# Altium PCB Solens.PcbDoc (part 2 of 3)
Units mil, origin at the board's own origin, x right, y up, seen from the top; angles counter-clockwise.
Board outline 5511.81 x 2755.91 mil, 4 copper layers (Top Layer, Signal Layer 2, Signal Layer 1, Bottom Layer), stack 65.08 mil thick; 208 components, 216 nets, 806 pads, 433 vias.
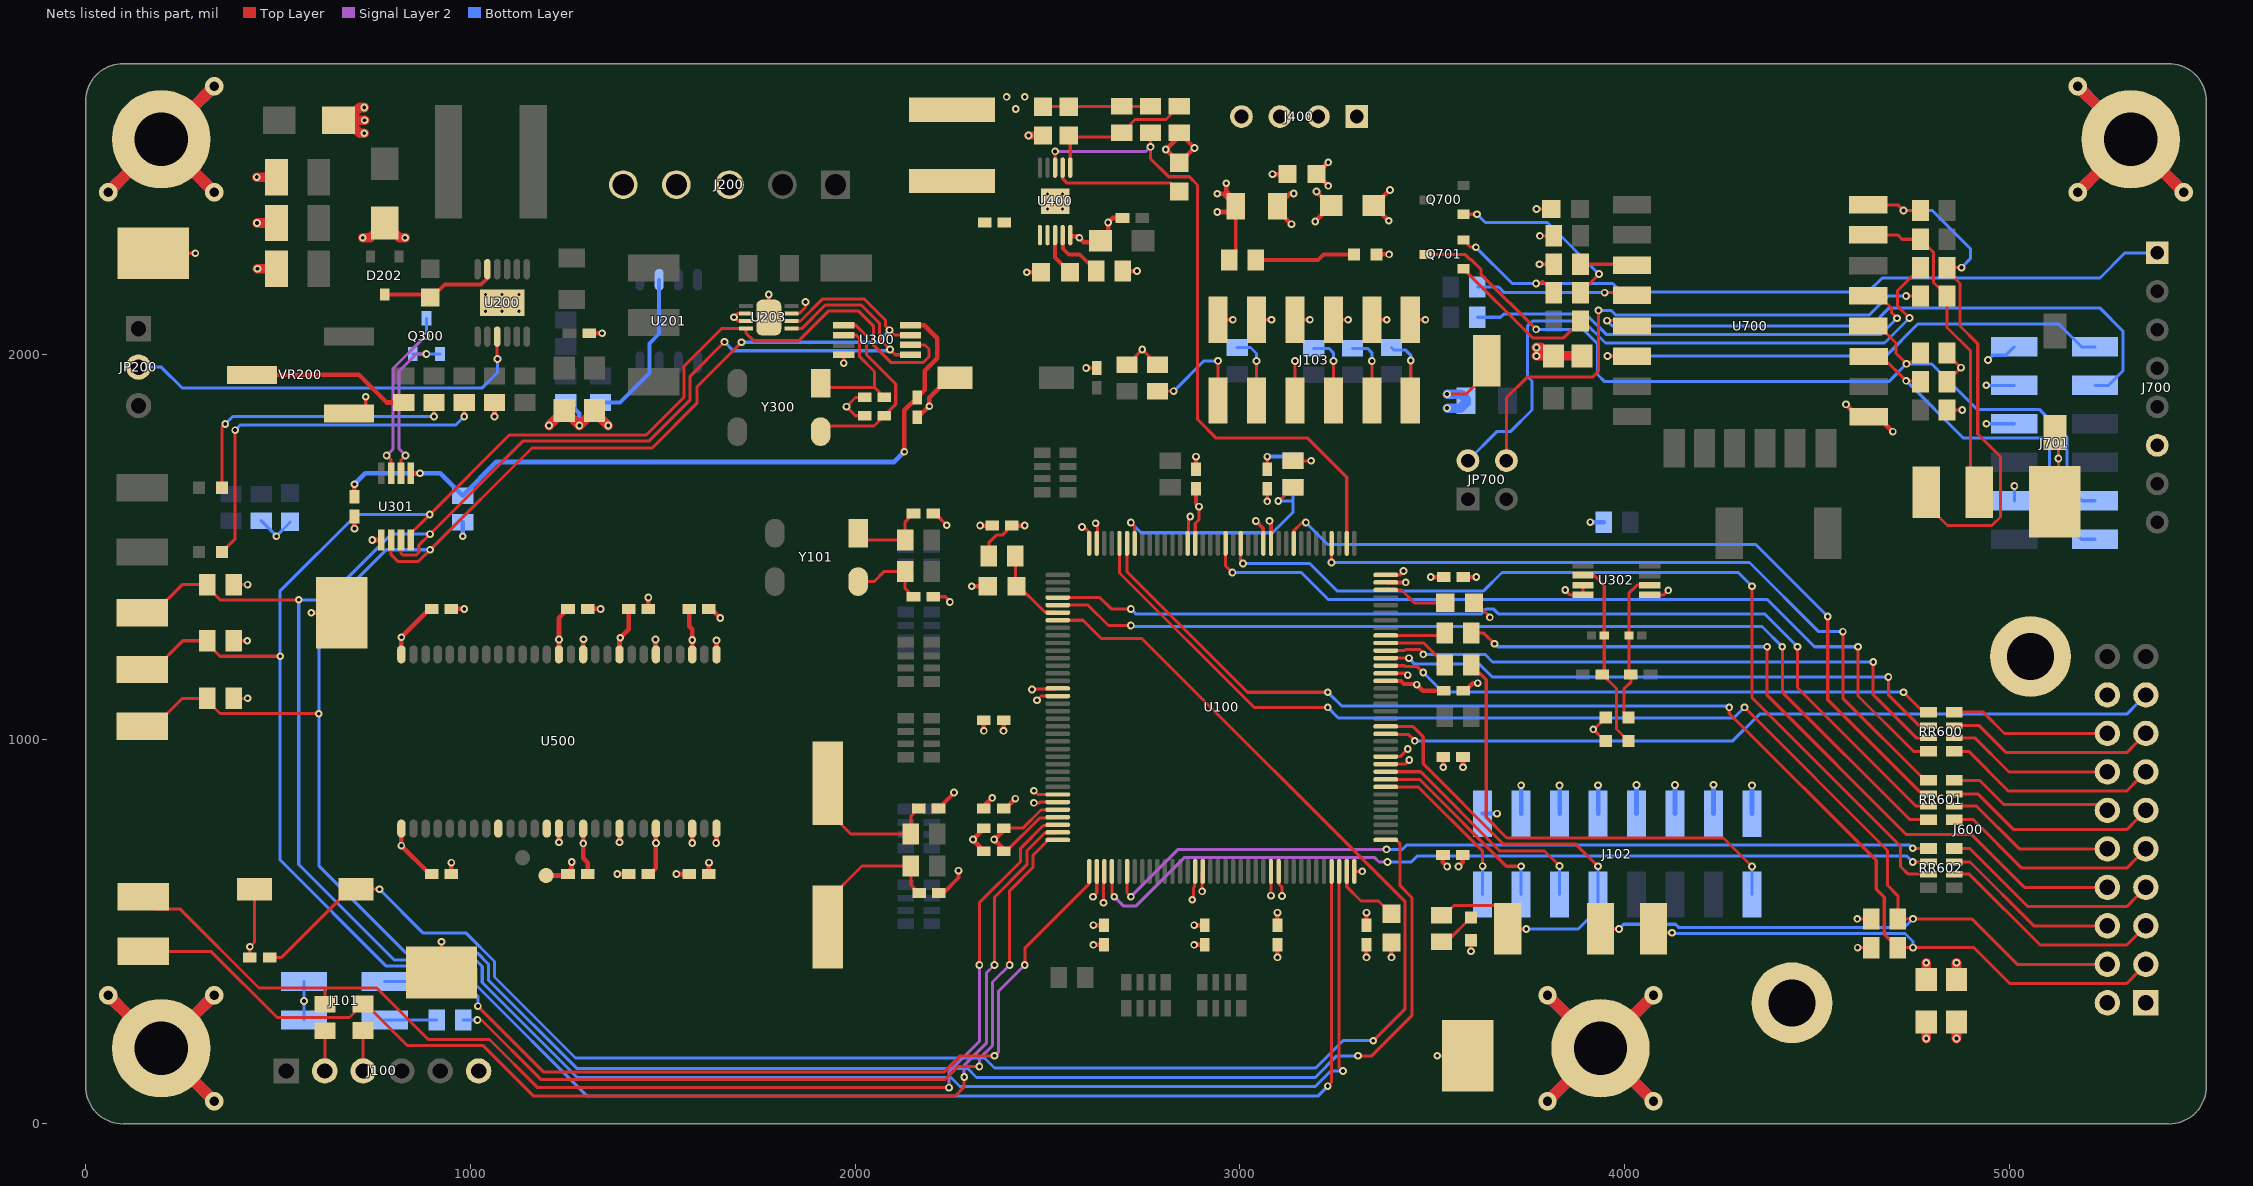
[diagram p4: the nets of this part, all layers, seen from the top]

## Via types
v1: diameter 20, hole 10, Top Layer to Bottom Layer, 392 vias
v2: diameter 20, hole 10, Top Layer to Bottom Layer, tented both sides, 14 vias
v3: diameter 47.24, hole 23.62, Top Layer to Bottom Layer, 13 vias
v4: diameter 24, hole 8, Top Layer to Bottom Layer, 10 vias
v5: diameter 20, hole 10, Top Layer to Bottom Layer, tented top, 4 vias

## Nets (pads, with @x,y where several pads share a name; then routed paths per layer and width w, separated by ;. In a path a pad name is that pad's centre, name@x,y a point inside that pad or via, vN(x,y) a via of type N, cw(c..) or ccw(c..) an arc to the next point about the centre after c; other vN are vias at no path point)
3V3: C104.1 C105.1 C107.1 C108.1 C109.1 C110.1 C111.1 C112.1 C116.1 C117.1 C118.1 C119.1 C120.1 C121.1 C122.1 C405.1 C406.2 C500.1 C501.1 C502.1 C503.1 C504.1 C505.1 C506.1 C507.1 C600.1 C601.1 J102.10 J102.14 J400.2 J400.3 J600.1 R106.1 R107.1 R108.1 R300.1 R301.1 R302.1 R400.1 R600.1 R601.1 R700.2 R701.2 R702.1 R703.1 SJ112.1 SJ300.1 SJ301.2 SJ700.1 TP104.1 U100.17 U100.30 U100.32 U100.33 U100.39 U100.52 U100.62 U100.72 U100.84 U100.95 U100.108 U100.121 U100.131 U100.143 U100.144 U500.1 U500.3 U500.9 U500.14 U500.27 U500.43 U500.49 | length 4115.7
  Top Layer w8: R302.1@384.84,1106.3 v1(421.26,1106.3) v1@422.24,1105.31 ; R301.1@384.84,1255.91 v1(420.28,1255.91) ; R300.1@384.84,1401.57 v1(421.26,1401.57) v1@422.24,1400.59 ; U500.14@1230.32,1220.47 1229.33,1221.46 U500.14@1230.32,1222.44 ; U500.43@1293.31,750.57 1294.29,751.55 1293.31,752.54 1290.64,755.2 1293.31,757.87 1292.32,758.86 1293.31,759.84 1290.35,762.8 1293.31,765.75 1294.29,766.73 U500.43@1293.31,767.72 ; U500.9@1387.8,1220.47 1386.81,1221.46 1387.8,1222.44 1388.78,1223.43 1387.8,1224.41 1385.83,1226.38 1386.81,1227.36 1384.84,1229.33 1387.8,1232.28 1388.78,1233.27 1387.8,1234.25 1386.81,1235.24 1387.8,1236.22 U500.9@1388.78,1237.2 ; U500.49@1482.28,765.75 1481.3,766.73 U500.49@1482.28,767.72 ; U500.3@1576.77,1220.47 1577.76,1221.46 1576.77,1222.44 1574.8,1224.41 1576.77,1226.38 1575.79,1227.36 U500.3@1576.77,1228.35 ; U500.1@1639.76,1220.47 1640.75,1221.46 U500.1@1639.76,1222.44 ; SJ112.1@2347.44,1476.38 2348.43,1476.38 2338.58,1486.22 2348.43,1496.06 2348.43,1511.81 2366.94,1530.32 2382.69,1530.32 C107.1@2407.48,1555.12 ; v1@2361.22,733.27 v1(2361.22,739.17) v1@2361.22,745.1 ; C105.1@2385.83,708.66 2392.72,708.66 2479.42,795.37 2509.93,795.37 2513.69,799.12 2524.7,799.12 U100.33@2526.57,797.24 ; C104.1@2385.83,768.7 2435.71,768.7 2482.96,815.94 2525.59,815.94 U100.32@2526.57,816.93 ; C109.1@2385.83,819.88 C109.1@2390.75,819.88 ; v1(2385.83,1021.65) v1@2386.81,1020.67 ; v1(2464.57,866.14) 2474.41,856.3 U100.30@2526.57,856.3 ; v1(2472.44,1101.38) 2483.27,1112.2 U100.17@2526.57,1112.2 ; v1(2589.57,1551.18) 2590.55,1551.18 2592.52,1553.15 2608.27,1537.4 U100.144@2608.27,1508.86 ; v1(2625,1561.02) 2629.83,1556.19 2629.83,1512.7 2626.97,1509.84 U100.143@2627.95,1508.86 ; v1(2645.67,574.8) 2645.76,574.89 2645.76,654.62 U100.39@2647.64,656.5 ; R107.1@2706.69,1973.43 v1(2746.06,2012.8) R106.1@2785.43,1973.43 ; U100.131@2864.17,1508.86 2866.05,1510.74 2866.05,1573.73 v1(2871.06,1578.74) ; v1(2901.82,604.58) 2901.82,654.77 U100.52@2903.54,656.5 ; U100.62@3100.39,656.5 3102.27,654.62 3102.27,622.45 3109.41,615.31 v1(3109.41,592.69) ; U100.72@3297.24,656.5 v1(3317.91,656.5) ; U100.84@3378.94,954.72 3416.34,954.72 v1(3436.02,974.41) ; v1@3425.2,1434.13 v1(3425.2,1437.01) ; v1(3538.39,1896.65) 3587.6,1896.65 3641.73,1950.79 TP104.1@3641.73,1983.27 ; v1@3777.56,2235.24 v1(3778.59,2234.2) R701.2@3815.94,2234.2 ; v1@3778.54,2307.09 v1(3779.5,2308.05) R700.2@3815.94,2308.05 ; v1(4604.33,533.07) R600.1@4640.75,533.07 ; v1(4605.31,458.27) R601.1@4640.75,458.27 ; R703.1@4837.6,1929.13 v1(4874.02,1965.55) 4837.6,2001.97 R702.1@4837.6,2003.83
  Top Layer w10: C121.1@2885.83,1701.77 v1(2885.83,1734.25) ; v1(3041.34,1566.93) 3060.15,1548.12 3060.15,1509.74 U100.121@3061.02,1508.86 ; C120.1@3070.87,1701.77 v1(3070.87,1734.25) ; U100.95@3378.94,1171.26 3431.35,1171.26 v1(3436.2,1166.41) ; U100.108@3378.94,1427.17 3415.35,1427.17 v1(3425.2,1437.01)
  Top Layer w12: U500.27@820.87,1220.47 v2(820.87,1264.76) 894.69,1338.58 C500.1@899.61,1338.58 ; v1@948.82,681.1 v1(950.79,679.13) C504.1@950.79,649.61 ; U500.14@1230.32,1220.47 1230.32,1222.44 v2(1230.32,1258.86) 1230.32,1314.96 C501.1@1253.94,1338.58 ; U500.43@1293.31,765.75 1293.31,759.84 1293.31,757.87 1293.31,752.54 1293.31,750.57 v2(1293.31,729.33) 1293.31,690.94 1305.12,679.13 C505.1@1305.12,649.61 ; U500.9@1387.8,1220.47 1387.8,1222.44 1387.8,1224.41 1387.8,1232.28 1387.8,1234.25 1387.8,1236.22 1387.8,1261.81 v2(1389.76,1263.78) 1411.42,1285.43 C502.1@1411.42,1338.58 ; C506.1@1462.6,649.61 1467.52,649.61 1482.28,664.37 v2(1482.28,730.32) 1482.28,765.75 U500.49@1482.28,767.72 ; C503.1@1568.9,1338.58 1568.9,1293.31 1576.77,1285.43 v2(1576.77,1257.87) 1576.77,1228.35 1576.77,1226.38 1576.77,1222.44 U500.3@1576.77,1220.47 ; C507.1@1620.08,649.61 v1(1620.08,679.13) v1@1622.05,681.1 ; U500.1@1639.76,1222.44 v2(1639.76,1256.89) ; C105.1@2385.83,708.66 2385.83,714.57 v1(2361.22,739.17) 2385.83,763.78 C104.1@2385.83,768.7 ; v1(2385.83,1021.65) C108.1@2385.83,1049.21 ; C109.1@2390.75,819.88 v1(2416.34,845.47) ; C107.1@2407.48,1555.12 v1(2440.94,1555.12) ; v1(2619.09,465.55) C110.1@2646.65,465.55 ; v1(2880.91,465.55) C111.1@2908.46,465.55 ; v1(3084.65,2468.5) C406.2@3124.02,2468.5 ; v1@3096.46,432.09 v1(3097.44,433.07) C112.1@3097.44,465.55 ; v1@3133.86,2337.6 v1(3133.86,2338.58) 3097.44,2375 R400.1@3097.44,2384.84 3130.91,2418.31 v1(3139.76,2418.31) ; v1(3195.87,2345.47) C405.1@3237.2,2386.81 3235.24,2386.81 v1(3198.82,2423.23) ; v1(3328.74,433.07) C116.1@3328.74,465.55 ; v1(3567.91,669.29) 3578.74,680.12 C122.1@3578.74,698.82 ; v1(3579.72,927.17) C117.1@3579.72,953.74 ; C118.1@3580.71,1125.98 3585.63,1125.98 3605.32,1145.67 v1(3618.11,1145.67) ; C119.1@3580.71,1421.26 v1(3614.17,1421.26)
  Top Layer w25: C601.1@4783.46,375.59 v1(4783.46,418.9) ; C600.1@4862.2,375.59 v1(4862.2,418.9)
  Signal Layer 2 w8: v1@2469.3,1103.54 2466.73,1103.54 2468.89,1101.38 v1(2472.44,1101.38)
  Bottom Layer w10: v1(3070.87,1734.25) 3117.13,1734.25 3127.95,1723.42 R108.1@3137.8,1723.42
  Bottom Layer w12: v1(980.32,1527.56) SJ300.1@980.32,1563.98 ; SJ700.1@3587.6,1879.92 SJ700.1@3587.6,1883.86 ; J102.14@3730.71,806.46 v1(3730.71,880.31) v1@3731.3,880.91 ; v1(3910.43,1563.98) SJ301.2@3945.87,1563.98 ; J102.10@3930.71,806.46 v1(3930.71,880.31)
  Bottom Layer w25: v1(3538.39,1860.24) 3572.83,1860.24 3587.6,1875 SJ700.1@3587.6,1879.92 ; v1(3538.39,1896.65) 3574.8,1896.65 SJ700.1@3587.6,1883.86
3V3_P: C302.1 C303.1 SJ300.2 U300.8 U301.1 | length 1984.3
  Top Layer w12: C303.1@698.82,1629.92 v1(698.82,1662.4) ; U301.1@845.47,1690.94 v1(869.09,1690.94) v1@870.08,1691.93 ; v1(2127.95,1747.05) 2127.95,1854.33 C302.1@2161.42,1887.8 2181.1,1907.48 2181.1,1957.68 2213.58,1990.16 2213.58,2042.32 2180.12,2075.79 U300.8@2143.7,2075.79
  Bottom Layer w12: v1(698.82,1662.4) 727.36,1690.94 v1(869.09,1690.94) 922.24,1690.94 SJ300.2@980.32,1632.87 1067.91,1720.47 2101.38,1720.47 v1(2127.95,1747.05)
3V3_PG: R402.1 U100.110 U400.8 | length 1744.1
  Top Layer w8: U400.8@2519.69,2485.24 v1(2519.69,2527.56) ; R402.1@2767.72,2575.79 v1(2767.72,2539.37) 2767.72,2508.62 2814.72,2461.61 2868.35,2461.61 2889.76,2440.2 2889.76,1831.1 2938.38,1782.48 3176.18,1782.48 3277.56,1681.1 U100.110@3277.56,1508.86
  Signal Layer 2 w8: v1(2519.69,2527.56) 2755.91,2527.56 v1(2767.72,2539.37)
BOOST: C200.2 D202.3 U200.11 | length 324.4
  Top Layer w10: D202.3@777.56,2155.51 887.8,2155.51 C200.2@895.67,2147.64 ; C200.2@887.02,2144.48 896.45,2144.48 933.47,2181.5 1027.96,2181.5 1044.29,2197.83 U200.11@1044.29,2221.46
BOOT0: R108.2 R109.1 U100.138 | length 669.3
  Top Layer w8: v1(2716.54,1562.99) 2726.38,1553.15 U100.138@2726.38,1508.86 ; v1(3099.41,1619.09) 3102.36,1619.09 R109.1@3137.8,1654.53
  Bottom Layer w8: v1(2716.54,1562.99) 2743.11,1536.42 3084.65,1536.42 3137.8,1589.57 3137.8,1618.11 ; v1(3099.41,1619.09) 3136.81,1619.09 3137.8,1618.11 ; R108.2@3137.8,1654.53 3137.8,1618.11
BTN0: C106.1 SW100.1 U100.7 | length 4788.1
  Top Layer w8: C106.1@478.35,433.07 509.84,433.07 687.01,610.24 SW100.1@702.76,610.24 v1(763.78,610.24) ; U100.7@2526.57,1309.06 2592.14,1309.06 2639.38,1261.81 2745.08,1261.81 3429.32,577.57 3429.32,299.4 v1(3346.46,216.54)
  Bottom Layer w8: v1(763.78,610.24) 877.95,496.06 989.38,496.06 1062.95,422.49 1062.95,381.93 1273.28,171.61 2336.27,171.61 2362.2,145.67 3196.85,145.67 3267.72,216.54 v1(3346.46,216.54)
CAM_D0: RR600.1 U100.96 | length 1460.5
  Top Layer w7.87: v1(4724.41,1122.05) 4776.18,1070.28 RR600.1@4789.37,1070.28
  Top Layer w8: U100.96@3378.94,1190.94 3427.8,1190.94 3430.33,1188.41 3461.2,1188.41 v1(3476.38,1173.17) v1(3476.38,1173.17)
  Bottom Layer w7.87: v1(3476.38,1173.17) v1(3476.38,1173.17) 3527.56,1122.05 v1(4724.41,1122.05)
CAM_D1: RR600.2 U100.97 | length 1514.2
  Top Layer w7.87: v1(4685.04,1161.42) 4685.04,1115.16 4765.16,1035.04 RR600.2@4789.37,1035.04
  Top Layer w8: U100.97@3379.01,1210.7 v1(3439.15,1210.7)
  Bottom Layer w7.87: 3632.02,1184.91 3655.51,1161.42 v1(4685.04,1161.42) v1@4688.98,1161.42
  Bottom Layer w8: v1(3439.15,1210.7) 3454.69,1195.17 3467.27,1195.17 3621.76,1195.17 3632.02,1184.91
CAM_D2: RR600.3 U100.98 | length 1558.8
  Top Layer w7.87: U100.98@3378.94,1230.31 3427.74,1230.31 3430.07,1232.64 3468.13,1232.64 3476.37,1224.4 v1(3476.37,1220.46) ; v1(4645.67,1200.79) 4645.67,1115.16 4757.28,1003.54 RR600.3@4789.37,1003.54
  Bottom Layer w7.87: v1(3476.37,1220.46) 3636.82,1220.46 3656.5,1200.79 v1(4645.67,1200.79)
CAM_D3: RR600.4 U100.126 | length 2159.7
  Top Layer w8: U100.126@2962.6,1508.86 2962.6,1450.77 v1(2980.31,1433.06) ; v1(4606.3,1240.16) 4606.3,1112.2 4750.2,968.31 RR600.4@4789.37,968.31
  Bottom Layer w8: v1(2980.31,1433.06) 3159.46,1433.06 3229.33,1363.19 4370.08,1363.19 4493.11,1240.16 v1(4606.3,1240.16)
CAM_D4: RR601.1 U100.112 | length 1936.7
  Top Layer w8: v1(3238.19,1459.35) U100.112@3238.19,1508.86 ; v1(4566.93,1279.53) 4566.93,1106.3 4780.12,893.11 RR601.1@4789.37,893.11
  Bottom Layer w8: v1(3238.19,1459.35) 4324.11,1459.35 4503.94,1279.53 v1(4566.93,1279.53)
CAM_D5: RR601.2 U100.117 | length 2110
  Top Layer w8: U100.117@3139.76,1508.86 3139.76,1541.36 3161.4,1562.99 v1(3171.26,1562.99) ; v1(4527.56,1318.9) 4527.56,1102.36 4772.05,857.87 RR601.2@4789.37,857.87
  Bottom Layer w8: v1(3171.26,1562.99) 3228.35,1505.91 4340.55,1505.91 v1(4527.56,1318.9)
CAM_D6: RR601.3 U100.4 | length 2560.1
  Top Layer w8: U100.4@2526.57,1368.11 2635.83,1368.11 2665.35,1338.58 v1(2716.54,1338.58) ; v1(4448.82,1240.16) 4448.82,1133.86 4756.3,826.38 RR601.3@4789.37,826.38
  Bottom Layer w8: v1(2716.54,1338.58) 2729.33,1325.79 3627.7,1325.79 3640.49,1338.58 3658.72,1338.58 3671.51,1325.79 4363.19,1325.79 v1(4448.82,1240.16)
CAM_D7: RR601.4 U100.5 | length 2562.8
  Top Layer w8: U100.5@2526.57,1348.43 2605.31,1348.43 2658.46,1295.28 v1(2716.54,1295.28) ; v1(4409.45,1240.16) 4409.45,1122.05 4740.35,791.14 RR601.4@4789.37,791.14
  Bottom Layer w8: v1(2716.54,1295.28) 2718.85,1292.96 4356.65,1292.96 v1(4409.45,1240.16)
CAM_HREF: RR602.2 U100.40 | length 2265.5
  Top Layer w8: U100.40@2667.32,656.5 2667.32,596.44 v1(2673.22,590.54) ; v1@4748.03,681.1 v1(4748.43,680.71) RR602.2@4789.37,680.71
  Signal Layer 2 w8: v1(2673.22,590.54) 2696.84,566.93 2730.31,566.93 2856.3,692.91 3349.21,692.91 3361.42,680.71 v1(3383.3,680.71)
  Bottom Layer w8: v1(3383.3,680.71) 3445.47,680.71 3461.61,696.85 4732.28,696.85 v1(4748.43,680.71)
CAM_HREF_U: J600.6 RR602.7 | length 466.7
  Top Layer w8: RR602.7@4856.3,680.71 4897.24,680.71 5062.99,514.96 J600.6@5254.33,514.96
CAM_PCLK: RR602.1 U100.42 | length 2202.6
  Top Layer w8: U100.42@2706.69,656.5 2706.69,600.39 v1(2716.54,590.55) ; v1(4748.43,716.54) 4749.02,715.94 RR602.1@4789.37,715.94
  Signal Layer 2 w8: v1(2716.54,590.55) 2839.6,713.62 v1(3381.07,713.62)
  Bottom Layer w8: v1(3381.07,713.62) 3422.29,713.62 3434.07,725.39 4739.57,725.39 v1(4748.43,716.54)
CAM_PCLK_U: J600.7 RR602.8 | length 588.5
  Top Layer w8: RR602.8@4856.3,715.94 4896.85,715.94 5047.83,564.96 5304.33,564.96 5334.65,595.28 J600.7@5334.65,630.31
CAM_PWDN: J600.17 U100.87 | length 2042.3
  Top Layer w8: U100.87@3378.94,1012.45 U100.87@3378.94,1013.78 3380.81,1011.9 3438.89,1011.9 3455.07,995.72 v1(3454.31,995.72)
  Bottom Layer w8: v1(3454.31,995.72) 4280.95,995.72 4350.2,1064.96 5304.33,1064.96 5334.65,1095.28 J600.17@5334.65,1130.31
CAM_RSV: J600.18
CAM_SCL: J600.3 R601.2 TP601.1 U100.139 | length 4005.6
  Top Layer w8: U100.139@2706.69,1508.86 2707.04,1508.51 2707.04,1434.69 3019.69,1122.05 v1(3228.35,1122.05) ; TP601.1@4074.8,506.89 4084.65,497.05 v1(4123.03,497.05) ; v1(4271.65,1082.68) 4271.65,1066.93 4653.54,685.04 4653.54,610.24 4674.4,589.38 4674.4,493.51 R601.2@4709.65,458.27 v1(4749.02,458.27) 4907.48,458.27 5000.79,364.96 5304.33,364.96 5334.65,395.28 J600.3@5334.65,430.31
  Bottom Layer w8: v1(3228.35,1122.05) 3263.78,1086.61 4267.72,1086.61 v1(4271.65,1082.68) ; v1(4123.03,497.05) 4125.01,495.07 4728.35,495.07 4749.02,474.41 v1(4749.02,458.27)
CAM_SDA: J600.4 R600.2 TP600.1 U100.140 | length 4016.2
  Top Layer w8: U100.140@2687.01,1508.86 2687.01,1432.1 3036.43,1082.68 v1(3228.35,1082.68) ; TP600.1@3937.01,506.89 v1(3985.24,506.89) ; v1(4311.02,1082.68) 4683.07,710.63 4683.07,620.08 4709.65,593.5 R600.2@4709.65,533.07 v1(4749.02,533.07) 4901.57,533.07 5019.69,414.96 J600.4@5254.33,414.96 ; J600.4@5227.56,423.23 J600.4@5234.65,430.31
  Bottom Layer w8: v1(3228.35,1082.68) 3255.91,1055.12 4283.46,1055.12 v1(4311.02,1082.68) ; v1(3985.24,506.89) 3997.39,519.05 4132.14,519.05 4140.12,511.07 4727.02,511.07 v1(4749.02,533.07)
CAM_VSYNC: RR602.3 U100.124 | length 2410.7
  Top Layer w8: U100.124@3001.97,1508.86 3001.97,1462.58 v1(3007.87,1456.68) ; v1(4330.71,1397.64) 4330.71,1107.87 4716.54,722.05 4716.54,669.29 4736.61,649.21 RR602.3@4789.37,649.21
  Bottom Layer w8: v1(3007.87,1456.68) 3181.11,1456.68 3252.31,1385.48 3633.51,1385.48 3681.1,1433.07 4295.28,1433.07 v1(4330.71,1397.64)
CAM_VSYNC_U: J600.5 RR602.6 | length 602.3
  Top Layer w8: RR602.6@4856.3,649.21 4895.28,649.21 5079.53,464.96 5304.33,464.96 5334.65,495.28 J600.5@5334.65,530.31
CAM_XCLK: R602.2 U100.100 | length 158.6
  Top Layer w8: U100.100@3380.81,1271.56 U100.100@3378.94,1269.69 3526.57,1269.69 R602.2@3532.48,1275.59
CAM_XCLK_T: J600.8 R602.1 | length 2000.4
  Top Layer w8: R602.1@3601.38,1275.59 3633.86,1275.59 v1(3661.42,1248.03) ; v1(4370.08,1240.16) 4370.08,1114.17 4732.28,751.97 4901.57,751.97 5038.58,614.96 J600.8@5254.33,614.96
  Bottom Layer w8: v1(3661.42,1248.03) 3669.29,1240.16 v1(4370.08,1240.16)
DEBUG_RX: R102.2 TP101.1 U100.35 | length 3115.5
  Top Layer w8: TP101.1@149.61,448.82 325.79,448.82 498.03,276.57 686.02,276.57 R102.2@721.46,312.01 ; R102.2@725.38,308.09 R102.2@721.46,312.01 ; v1(2283.46,122.05) 2283.46,96.46 2259.5,72.49 1164.73,72.49 1033.47,203.74 836.61,203.74 728.35,312.01 R102.2@721.46,312.01 ; v1(2362.2,413.39) 2362.2,589.57 2446.12,673.48 2446.12,709.59 2492.53,756 2524.7,756 U100.35@2526.57,757.87
  Signal Layer 2 w8: v1(2283.46,122.05) 2283.46,152.57 2341.03,210.14 2341.03,392.21 v1(2362.2,413.39)
DEBUG_TX: R101.2 TP100.1 U100.34 | length 3163.1
  Top Layer w8: TP100.1@149.61,590.55 181.1,559.06 245.08,559.06 450.79,353.35 622.05,353.35 ; R101.2@622.05,311.02 622.05,353.35 ; v1(2244.09,94.49) 1175.2,94.49 1049.94,219.74 890.5,219.74 756.89,353.35 622.05,353.35 ; v1(2322.83,413.39) 2322.83,574.8 2430.12,682.09 2430.12,716.52 2489.27,775.68 2524.7,775.68 U100.34@2526.57,777.56
  Signal Layer 2 w8: v1(2244.09,94.49) 2244.09,135.83 2322.83,214.57 v1(2322.83,413.39)
DN: Q300.1 U301.3 | length 452
  Top Layer w8: v1(782.48,1737.2) 794.29,1725.39 U301.3@794.29,1690.94
  Signal Layer 2 w8: v1(782.48,1737.2) 798.96,1753.69 798.96,1963.32 882.88,2047.24 v1(885.83,2047.24)
  Bottom Layer w8: v1(885.83,2047.24) Q300.1@885.83,2093.5
DP: Q300.2 Q300.3 U301.2 | length 437.6
  Top Layer w8: U301.2@819.88,1690.94 819.88,1725.39 v1(831.69,1737.2)
  Signal Layer 2 w8: v1(831.69,1737.2) 814.96,1753.94 814.96,1956.69 859.25,2000.98 v1(885.83,2000.98)
  Bottom Layer w8: Q300.3@850.39,2000.98 v1(885.83,2000.98) Q300.2@921.26,2000.98
DTR_L: J700.1 Q701.2 R706.2 | length 1962
  Top Layer w8: Q701.2@3580.71,2297.24 3599.41,2278.54 v1(3613.19,2278.54) ; v1(3769.69,2184.06) 3780.43,2184.06 3786.34,2189.96 R706.2@3815.94,2160.36
  Bottom Layer w8: v1(3613.19,2278.54) 3707.68,2184.06 v1(3769.69,2184.06) 3968.5,2184.06 3990.16,2162.4 4632.87,2162.4 4668.94,2198.47 5234.89,2198.47 5300.2,2263.78 J700.1@5383.86,2263.78
EXTRA_RX: R105.2 U100.37 | length 2092
  Top Layer w8: v1(1019.68,306.36) 1191.2,134.84 2230.71,134.84 2273.03,177.17 v1(2362.2,177.17) ; v1(2440.94,413.39) 2440.94,456.69 2608.27,624.02 U100.37@2608.27,656.5
  Signal Layer 2 w8: v1(2362.2,177.17) 2373.03,187.99 2373.03,345.47 v1(2440.94,413.39)
  Bottom Layer w8: R105.2@981.3,370.08 1019.68,331.69 v1(1019.68,306.36)
EXTRA_TX: R104.2 U100.36 | length 2106.6
  Top Layer w8: v1(1018.31,270.08) 1029.13,270.08 1183.07,116.14 2234.64,116.14 2268.1,149.61 v1(2322.83,149.61) ; v1(2401.57,413.39) 2401.57,606.31 2462.12,666.85 2462.12,698.5 2501.81,738.19 U100.36@2526.57,738.19
  Signal Layer 2 w8: v1(2322.83,149.61) 2322.83,169.29 2357.03,203.49 2357.03,368.84 v1(2401.57,413.39)
  Bottom Layer w8: R104.2@981.3,270.08 v1(1018.31,270.08)
GND: C100.2 C101.2 C102.2 C103.2 C104.2 C105.2 C106.2 C107.2 C108.2 C109.2 C110.2 C111.2 C112.2 C113.1 C114.2 C115.2 C116.2 C117.2 C118.2 C119.2 C120.2 C121.2 C122.2 C124.2 C201.2 C202.2 C203.2 C204.2 C205.2 C206.2 C207.2 C300.2 C301.2 C302.2 C303.2 C401.2 C402.2 C404.1 C405.2 C406.1 C407.2 C408.2 C500.2 C501.2 C502.2 C503.2 C504.2 C505.2 C506.2 C507.2 C600.2 C601.2 C700.2 C701.2 C702.2 D200.1 D300.1 D301.2 D305.1 D400.2 J100.6 J101.2 J101.4 J102.2 J102.4 J102.6 J102.8 J102.12 J102.16 J103.2 J103.4 J103.5 J103.6 J103.8 J103.10 J103.12 J200.3 J200.5 J400.1 J400.4 J600.2 J700.6 J701.2 J701.4 J701.6 J701.10 MTGH1.1 MTGH2.1 MTGH3.1 MTGH4.1 R109.2 R207.2 R208.2 R404.1 R405.2 R708.1 SJ200.2 SW100.2 SW101.2 SW700.1 TP105.1 TP106.1 TP200.1 TP303.1 TP500.1 TP702.1 U100.16 U100.31 U100.38 U100.51 U100.61 U100.83 U100.94 U100.107 U100.120 U100.130 U200.13 U203.2 U203.3 U203.7 U203.9 U300.4 U301.5 U302.3 U302.4 U302.5 U400.5 U400.11 U500.6 U500.12 U500.28 U500.41 U500.46 U500.52 U500.54 U700.15 VR200.2 | length 7174.4
  Top Layer w8: TP200.1@176.18,2262.8 v1(285.43,2262.8) ; C106.2@427.17,433.07 v1(427.17,460.63) 438.98,472.44 SW100.2@438.98,610.24 ; TP105.1@925.2,393.7 v1(925.2,473.43) v1@926.18,474.41 ; U500.12@1293.31,1220.47 1295.28,1222.44 U500.12@1294.29,1223.43 ; U500.46@1387.8,761.81 1390.75,764.76 U500.46@1387.8,767.72 ; U500.6@1481.3,1221.46 U500.6@1482.28,1220.47 ; U500.54@1638.78,754.92 1639.76,755.91 1641.73,757.87 1639.76,759.84 1635.83,763.78 U500.54@1639.76,767.72 ; U203.3@1716.54,2086.61 1694.88,2086.61 v1(1685.04,2096.46) 1685.04,2097.44 1693.9,2106.3 U203.2@1716.54,2106.3 ; U203.9@1775.59,2095.47 v1(1775.59,2155.51) ; U203.7@1834.65,2106.3 1854.57,2106.3 1871.15,2122.88 v1(1871.15,2135.94) ; v1(1970.47,1977.36) U300.4@1970.47,1999.02 ; C300.2@2024.61,1840.55 2000.98,1840.55 v1(1977.36,1864.17) 2000.98,1887.8 2023.62,1887.8 C301.2@2024.61,1888.78 ; v1(2459.65,1128.94) 2460.72,1130.01 2520.94,1130.01 2524.7,1133.77 U100.16@2526.57,1131.89 ; v1(2464.56,834.64) 2479.02,834.64 2481,836.61 U100.31@2526.57,836.61 ; v1@2599.41,1963.58 v1(2600.39,1964.57) C124.2@2627.95,1964.57 ; v1(2618.11,590.55) 2627.95,600.39 U100.38@2627.95,656.5 ; v1(2875.98,582.68) 2879.82,586.51 2879.82,613.69 2881.98,615.85 U100.51@2881.98,654.62 ; U100.130@2885.74,1510.74 U100.130@2883.86,1508.86 2883.86,1560.42 2893.7,1570.27 v1(2893.7,1604.33) ; J103.2@2942.91,2089.92 v1(2981.65,2089.92) ; J103.4@3042.91,2089.92 v1(3082.05,2089.92) ; v1(3076.77,1567.42) v1@3080.71,1563.48 ; v1(3080.71,593.5) U100.61@3080.71,656.5 ; U100.120@3080.71,1508.86 U100.120@3082.59,1510.74 ; R109.2@3137.8,1723.43 v1(3185.04,1723.43) ; v1@3142.72,1983.27 v1(3142.91,1983.07) J103.5@3142.91,1879.92 ; J103.6@3142.91,2089.92 v1(3181.73,2089.92) ; J103.8@3242.91,2089.92 v1(3281.14,2089.92) ; J103.10@3342.91,2089.92 v1(3381.54,2089.92) ; U100.83@3378.94,935.04 3429.26,935.04 v1(3440.13,945.91) ; U100.107@3378.94,1407.48 3380.81,1405.6 3399.7,1405.6 U100.107@3400.88,1406.79 ; J103.12@3442.91,2089.92 v1(3481.93,2089.92) ; v1@3511.81,178.15 v1(3512.8,177.17) TP106.1@3592.52,177.17 ; v1(3600.39,448.82) D301.2@3600.39,477.36 ; C114.2@3608.27,1354.58 3613.92,1354.58 3649.61,1318.9 v1(3649.61,1316.58) ; v1(3770.67,2377.95) C700.2@3809.06,2377.95 ; v1(3845.47,1387.8) 3845.47,1386.81 3857.28,1375 U302.4@3891.73,1375 U302.3@3891.73,1400.59 ; D305.1@3950.79,995.08 3948.82,995.08 v1(3918.31,1025.59) 3920.28,1025.59 D300.1@3950.79,1056.1 ; U302.5@4064.96,1375 4101.38,1375 v1(4113.19,1386.81) ; R708.1@4837.6,1855.29 v1(4876.99,1855.29) v1@4877.95,1854.33 ; TP702.1@5118.11,1617.13 5126.97,1625.98 v1(5126.97,1729.33) 5126.97,1788.39 SW700.1@5118.11,1797.24
  Top Layer w10: VR200.2@685.04,1846.75 728.06,1846.75 728.35,1847.04 v1(728.35,1889.76) ; C102.2@2202.76,1370.08 2234.25,1370.08 2246.18,1358.15 v1(2246.18,1356.38) ; C103.2@2202.76,1586.61 2207.68,1586.61 v1(2238.19,1556.1) ; C100.2@2216.54,819.88 2256.89,860.24 v1(2256.89,861.22) ; C101.2@2217.52,600.39 2229.33,600.39 2268.7,639.76 v1(2268.7,658.46) ; v1(2306.1,739.17) v1@2306.1,740.16 ; C105.2@2334.65,708.66 C105.2@2334.65,710.63 ; v1(2356.42,847.5) v1@2356.48,847.44 ; v1@2357.28,842.52 2357.28,846.64 v1@2356.48,847.44 ; v1@2359.25,847.44 v1@2356.48,847.44 ; v1@2879.92,517.72 v1(2880.91,516.73) ; C121.2@2885.83,1650.59 2885.83,1612.2 v1(2893.7,1604.33) ; v1(3070.87,1618.11) C120.2@3070.87,1650.59 ; U100.120@3080.71,1508.86 v1@3080.71,1563.48 ; U100.94@3378.94,1151.57 3418.51,1151.57 3426.67,1143.41 3457.97,1143.41 v1(3459.65,1141.73) ; U100.107@3380.81,1406.6 3381.69,1407.48 v1(3431.1,1407.48)
  Top Layer w12: v1(586.61,1328.74) TP303.1@666.34,1328.74 ; v1(698.82,1547.24) C303.2@698.82,1578.74 ; v1@744.09,1516.73 v1(745.08,1517.72) U301.5@768.7,1517.72 ; U500.28@820.87,767.72 v2(820.87,723.43) 894.69,649.61 C504.2@899.61,649.61 ; C500.2@950.79,1338.58 v1(984.25,1338.58) ; v1(1062.99,1838.58) R207.2@1062.99,1875 ; TP500.1@1196.85,645.67 1250,645.67 C505.2@1253.94,649.61 1253.94,655.51 1263.78,665.35 v1(1263.78,681.1) ; v2(1230.32,732.28) U500.41@1230.32,767.72 ; U500.12@1293.31,1220.47 v2@1293.31,1258.86 ; C501.2@1305.12,1338.58 v1(1338.58,1338.58) ; C204.2@1309.06,2055.12 v1(1342.52,2055.12) ; v1(1381.89,649.61) C506.2@1411.42,649.61 ; v2(1387.8,732.28) 1387.8,761.81 U500.46@1387.8,767.72 ; C502.2@1462.6,1338.58 v1(1462.6,1368.11) v1@1464.57,1370.08 ; U500.6@1481.3,1221.46 v2(1481.3,1258.86) ; v1(1535.43,649.61) C507.2@1568.9,649.61 ; v2(1576.77,730.32) U500.52@1576.77,767.72 ; C503.2@1620.08,1338.58 1625.98,1338.58 v1(1649.61,1314.96) ; v2(1638.78,730.32) 1639.76,731.3 1639.76,755.91 1639.76,759.84 U500.54@1639.76,767.72 ; C302.2@2161.42,1836.61 2163.39,1836.61 2192.02,1865.25 v1(2193.02,1865.25) 2193.02,1886.92 2245.08,1938.98 SW101.2@2259.84,1938.98 ; v1(2303.15,1397.64) C113.1@2344.49,1397.64 ; v1(2324.8,1555.12) C107.2@2356.3,1555.12 ; C105.2@2334.65,710.63 v1(2306.1,739.17) 2334.65,767.72 C104.2@2334.65,768.7 ; C109.2@2334.65,819.88 2334.65,825.61 v1@2356.48,847.44 ; v1(2334.65,1021.65) C108.2@2334.65,1049.21 ; v1(2445.87,2213.58) C407.2@2483.27,2213.58 ; U400.5@2559.35,2310.04 2562.3,2307.09 2582.68,2307.09 v1(2582.68,2303.15) 2594.49,2291.34 2633.86,2291.34 2657.48,2314.96 v1(2657.48,2342.52) 2669.29,2354.33 C402.2@2694.88,2354.33 ; v1(2619.09,516.73) C110.2@2646.65,516.73 ; R405.2@2695.87,2216.54 v1(2732.28,2216.54) ; v1(2880.91,516.73) C111.2@2908.46,516.73 ; C112.2@3097.44,511.81 C112.2@3097.44,513.78 ; C112.2@3097.44,516.73 v1(3097.44,549.21) ; v1(3229.33,2437.99) 3200.79,2466.54 3196.85,2466.54 v1(3229.33,2499.02) ; C116.2@3328.74,516.73 v1(3328.74,549.21) ; D400.2@3355.31,2259.84 v1(3387.8,2259.84) v1@3388.78,2258.86 ; v1(3386.81,2347.44) C405.2@3347.44,2386.81 3349.41,2386.81 v1(3389.76,2427.17) ; C115.2@3393.7,471.46 v1(3393.7,433.07) v1@3394.69,432.09 ; v1(3459.65,1141.73) 3475.39,1125.98 C118.2@3529.53,1125.98 ; v1(3496.06,1421.26) C119.2@3529.53,1421.26 ; C122.2@3527.56,698.82 3527.56,680.12 v1(3538.39,669.29) ; v1(3528.54,927.17) C117.2@3528.54,953.74 ; v1(4574.8,1870.08) 4607.32,1837.56 U700.15@4633.87,1837.56 4658.5,1837.56 v1(4696.85,1799.21) ; v1@2807.09,2531.5 2842.52,2566.93 R404.1@2842.52,2575.79 v1(2881.89,2536.42) 2880.91,2536.42 C408.2@2842.52,2498.03 2809.06,2531.5 v1@2807.09,2531.5
  Top Layer w20: v1(2450.79,2568.9) C404.1@2488.19,2568.9
  Top Layer w25: v1(444.88,2460.63) C201.2@496.06,2460.63 ; v1(445.89,2341.51) C202.2@496.06,2341.51 ; v1(446.9,2222.39) C203.2@496.06,2222.39 ; v1(720.47,2303.15) 739.2,2303.15 D200.1@777.56,2341.51 815.92,2303.15 v1(830.71,2303.15) ; v1(1204.72,1814.96) C205.2@1244.09,1854.33 v1(1283.46,1814.96) C206.2@1322.83,1854.33 1322.83,1850.39 v1(1358.27,1814.96) ; v1(3770.67,1996.06) C701.2@3804.13,1996.06 ; v1(3770.67,2017.82) 3782.37,2017.82 C701.2@3804.13,1996.06 ; C702.2@3888.78,1996.06 C701.2@3814.96,1996.06 C701.2@3804.13,1996.06 ; v1(4783.46,222.05) C601.2@4783.46,265.35 ; v1(4862.2,222.05) C600.2@4862.2,265.35
  Bottom Layer w8: R208.2@456.69,1567.91 496.06,1528.54 v1(496.06,1527.56) 531.5,1562.99 C207.2@531.5,1564.96 ; J101.4@567.56,270.08 v1(567.56,319.53) J101.2@567.56,370.08 ; v1@4937.01,1917.32 v1(4939.37,1919.69) J701.4@5012.44,1919.69 ; v1@4938.98,1818.9 v1(4939.76,1819.69) J701.6@5012.44,1819.69 ; v1(4943.9,1985.24) 4956.35,1997.69 4990.44,1997.69 J701.2@5012.44,2019.69 ; v1@5011.81,1658.46 v1(5012.44,1657.83) J701.10@5012.44,1619.69
  Bottom Layer w10: J102.16@3630.71,806.46 v1(3667.95,806.46)
  Bottom Layer w12: SJ200.2@1244.09,1875 SJ200.2@1248.03,1875 1254.92,1875 1283.46,1846.46 v1(1283.46,1814.96) ; J102.12@3830.71,806.46 v1(3830.71,879.92) v1@3831.69,880.91 ; J102.8@4030.71,806.46 v1(4030.71,880.71) ; J102.6@4130.71,806.46 v1(4130.71,880.71) ; J102.4@4230.71,806.46 v1(4230.71,881.5) ; J102.2@4330.71,806.46 v1(4330.71,879.92) v1@4331.69,880.91
  other v1: 2807.09,2532.48
  other v2: 1294.29,1259.84
  other v3: 334.65,59.06 3799.21,59.06 4074.8,59.06 59.06,334.65 334.65,334.65 3799.21,334.65 4074.8,334.65 59.06,2421.26 334.65,2421.26 5177.17,2421.26 5452.76,2421.26 334.65,2696.85 5177.17,2696.85
  other v4: 1039.37,2112.2 1082.68,2112.2 1125.98,2112.2 1039.37,2155.51 1082.68,2155.51 1125.98,2155.51 2500,2377.95 2539.37,2377.95 2500,2417.32 2539.37,2417.32
GPIO0: J701.9 Q701.3 R702.2 U700.18 | length 2375.7
  Top Layer w8: Q701.3@3482.28,2259.84 3584.66,2259.84 3598.25,2246.25 3601.43,2246.25 3625.98,2221.69 3625.98,2208.66 v1(3769.69,2064.96) ; U700.18@4632.87,2073.56 4660.69,2073.56 4704.72,2029.53 4704.72,2002.95 v1(4732.28,1975.39) 4740.26,1975.39 R702.2@4768.7,2003.83
  Bottom Layer w8: v1(3769.69,2064.96) 3891.74,2064.96 3929.13,2027.57 3929.13,1947.83 3947.83,1929.13 4686.02,1929.13 v1(4732.28,1975.39) 4797.14,1975.39 4915.25,1857.28 5076.81,1857.28 5148.97,1785.13 5148.97,1659.1 5188.39,1619.69 J701.9@5222.44,1619.69
GPIO2: J701.11 R703.2 U700.17 | length 918
  Top Layer w8: U700.17@4633.87,1994.56 4667.84,1994.56 v1(4731.3,1931.1) 4766.73,1931.1 R703.2@4768.7,1929.13
  Bottom Layer w8: v1(4731.3,1931.1) 4879.72,1782.69 5085.43,1782.69 5104.33,1763.78 5104.33,1602.36 5187.01,1519.69 J701.11@5222.44,1519.69
GPIO4: R710.1 U700.19 | length 1240.7
  Top Layer w8: U700.19@4632.87,2152.56 4661.42,2152.56 4693.35,2120.63 4693.35,2108.28 v1(4707.68,2093.95) v1@4707.68,2092.52
  Bottom Layer w8: R710.1@3617.13,2096.46 3677.17,2096.46 3685.29,2104.58 3899.35,2104.58 3951.77,2052.17 4665.89,2052.17 v1(4707.68,2093.95)
GPIO12: J701.1 U700.6 | length 1390.5
  Top Layer w8: v1@3954.72,1996.06 v1(3955.23,1995.56) U700.6@4018.87,1995.56
  Bottom Layer w8: v1(3955.23,1995.56) 4678.63,1995.56 4761.81,2078.74 5127.95,2078.74 5187.01,2019.69 J701.1@5222.44,2019.69
GPIO14: J701.3 U700.5 | length 1653
  Top Layer w8: v1(3953.93,2087.7) 3994.59,2087.7 4008.73,2073.56 U700.5@4018.87,2073.56
  Bottom Layer w8: v1(3953.93,2087.7) 3967.81,2073.82 4639.76,2073.82 4687.01,2121.06 5234.25,2121.06 5294.44,2060.87 5294.44,1956.84 5257.28,1919.69 J701.3@5222.44,1919.69
GPIO16: R712.1 U700.4 | length 411.7
  Top Layer w8: v1@3946.85,2160.43 v1(3947.87,2160.43) 4011.99,2160.43 U700.4@4018.87,2153.56
  Bottom Layer w8: R712.1@3617.13,2175.2 3672.24,2175.2 3687.01,2160.43 v1(3947.87,2160.43)
I2C2_ALERT: R302.2 TP302.1 U100.73 U203.6 U300.7 U301.6 | length 7172
  Top Layer w8: TP302.1@147.64,1033.46 179.13,1033.46 251.97,1106.3 R302.2@315.94,1106.3 315.94,1100.39 349.6,1066.74 605.5,1066.74 v1(606.3,1065.94) ; U301.6@794.29,1517.72 794.29,1479.33 811.46,1462.16 865.53,1462.16 v1(895.67,1492.29) 1160.27,1756.89 1472.44,1756.89 1588.58,1873.03 1588.58,1915.35 v1(1704.72,2031.5) ; U203.6@1834.65,2086.61 1858.28,2086.61 1915.92,2144.25 2022.88,2144.25 2079.24,2087.89 2079.24,2073.31 v1(2089.57,2062.99) 2102.36,2050.2 U300.7@2143.7,2050.2 ; v1(3307.09,177.17) 3342.52,177.17 3446.85,281.5 3446.85,588.58 3416.34,619.09 3416.34,728.35 3406.5,738.19 U100.73@3378.94,738.19
  Bottom Layer w8: v1(895.67,1492.29) 781.28,1492.29 606.3,1317.31 v1(606.3,1065.94) 606.3,671.26 833.66,443.9 1018.92,443.9 1046.95,415.86 1046.95,374.31 1276.57,144.69 2291.94,144.69 2315.56,121.06 3195.87,121.06 3251.97,177.17 v1(3307.09,177.17) ; v1(1704.72,2031.5) 2058.07,2031.5 v1(2089.57,2062.99)
I2C2_SCL: R301.2 TP301.1 U100.69 U203.4 U300.6 U301.8 | length 7014
  Top Layer w8: TP301.1@147.64,1181.1 178.15,1181.1 252.95,1255.91 R301.2@315.94,1255.91 315.94,1249.02 349.41,1215.55 v1(505.91,1215.55) ; U301.8@845.47,1503.94 U301.8@845.47,1517.72 845.47,1534.45 v1(894.68,1583.66) 1101.48,1790.46 1457.04,1790.46 1555.31,1888.73 1555.31,1969.54 1652.7,2066.93 U203.4@1716.54,2066.93 1716.54,2055.12 1736.22,2035.43 1853.36,2035.43 1930.18,2112.25 2009.63,2112.25 2047.24,2074.64 2047.24,2024.99 2093.68,1978.55 2176.23,1978.55 2191.93,1994.25 2191.93,2013.78 2181.1,2024.61 U300.6@2143.7,2024.61 ; v1(3228.35,98.43) 3238.19,108.27 U100.69@3238.19,656.5
  Bottom Layer w8: v1(894.68,1583.66) 704.12,1583.66 505.91,1385.44 v1(505.91,1215.55) 505.91,686.02 781.75,410.18 1007.38,410.18 1014.95,402.61 1014.95,361.03 1303.5,72.49 3202.41,72.49 v1(3228.35,98.43)
I2C2_SDA: R300.2 TP300.1 U100.70 U203.5 U300.5 U301.7 | length 7079.3
  Top Layer w8: TP300.1@147.64,1328.74 178.15,1328.74 250.98,1401.57 R300.2@315.94,1401.57 315.94,1395.67 349.6,1362.02 411.47,1362.02 411.66,1362.2 v1(554.13,1362.2) ; U301.7@819.88,1517.72 819.88,1483.27 824.99,1478.16 858.91,1478.16 865.94,1485.19 865.94,1503.73 v1(895.18,1532.97) 1136.67,1774.46 1463.66,1774.46 1571.31,1882.1 1571.31,1943.35 v1(1660.43,2032.48) ; U203.5@1834.65,2066.93 1861.22,2066.93 1922.54,2128.25 2016.26,2128.25 2063.24,2081.26 2063.24,2040.1 v1(2090.55,2012.8) 2104.33,1999.02 U300.5@2143.7,1999.02 ; U100.70@3257.87,656.5 3257.87,147.64 v1(3267.72,137.8)
  Bottom Layer w8: v1(895.18,1532.97) 794.78,1532.97 624.02,1362.2 v1(554.13,1362.2) 554.13,674.21 802.17,426.18 1014.01,426.18 1030.95,409.24 1030.95,367.68 1277.57,121.06 2249.02,121.06 2272.64,97.44 3195.87,97.44 3236.22,137.8 v1(3267.72,137.8) ; v1(1660.43,2032.48) 1683.42,2009.5 2087.25,2009.5 v1(2090.55,2012.8)
LED0: J102.9 R304.1 TP306.1 U100.88 | length 1337.8
  Top Layer w8: U100.88@3378.94,1033.46 3448.82,1033.46 3476.31,1005.97 3476.31,936.09 3685.04,727.36 3873.03,727.36 v1(3930.71,669.69) ; R304.1@3523.62,542.32 3530.51,542.32 3556.1,567.91 3667.32,567.91 3695.87,539.37 TP306.1@3695.87,506.89 v1(3744.09,506.89)
  Bottom Layer w8: v1(3744.09,506.89) 3878.94,506.89 3930.71,558.66 J102.9@3930.71,596.46 v1(3930.71,669.69)
LED1: J102.11 U100.82 | length 627.7
  Top Layer w8: U100.82@3379.34,915.76 U100.82@3378.94,915.35 3469.49,915.35 3675.2,709.65 3791.34,709.65 v1(3830.71,670.28)
  Bottom Layer w8: J102.11@3830.71,596.46 v1(3830.71,670.28)
LED2: J102.13 U100.81 | length 518.7
  Top Layer w8: U100.81@3378.94,895.67 3466.54,895.67 3692.32,669.88 v1(3730.71,669.88)
  Bottom Layer w8: J102.13@3730.71,596.46 v1(3730.71,669.88)
LED3: J102.15 U100.80 | length 433.4
  Top Layer w8: U100.80@3378.94,875.98 3463.58,875.98 3630.71,708.86 v1(3630.71,670.08)
  Bottom Layer w8: J102.15@3630.71,596.46 v1(3630.71,670.08)
MCO2: R110.1 U100.99 | length 178.7
  Top Layer w8: U100.99@3378.94,1250 3477.95,1250 3532.48,1195.47 R110.1@3532.48,1192.91
MCO2_T: J102.1 R110.2 | length 1228.7
  Top Layer w8: R110.2@3601.38,1192.91 3601.98,1192.91 3640.11,1154.78 3640.11,796.9 3693.65,743.36 4256.64,743.36 v1(4330.71,669.29)
  Bottom Layer w8: J102.1@4330.71,596.46 v1(4330.71,669.29)
NC1: U500.40
NC2: U500.36
NetC100_1: C100.1 SJ102.2 Y100.2 | length 410.3
  Top Layer w8: Y100.2@1917.32,897.64 Y100.2@1929.13,885.83 ; Y100.2@1933.56,881.4 Y100.2@1929.13,885.83 ; C100.1@2165.35,819.88 2144.69,799.21 SJ102.2@2144.69,753.94 1988.19,753.94 1929.13,812.99 Y100.2@1929.13,885.83
NetC101_1: C101.1 R103.2 Y100.1 | length 401
  Top Layer w8: Y100.1@1929.13,511.81 1929.13,581.69 2017.72,670.28 R103.2@2144.69,670.28 2144.69,622.05 C101.1@2166.34,600.39
NetC102_1: C102.1 SJ100.2 Y101.4 | length 208
  Top Layer w8: Y101.4@2007.87,1409.45 2049.21,1409.45 2075.79,1436.02 SJ100.2@2129.92,1436.02 2129.92,1391.73 C102.1@2151.57,1370.08
NetC103_1: C103.1 SJ101.2 Y101.1 | length 207.3
  Top Layer w8: Y101.1@2007.87,1535.43 2025.59,1517.72 SJ101.2@2129.92,1517.72 2129.92,1564.96 C103.1@2151.57,1586.61
NetC113_2: C113.2 SJ112.2 U100.6 | length 212.1
  Top Layer w8: SJ112.2@2416.34,1476.38 2416.34,1406.81 2492.53,1330.62 2524.7,1330.62 U100.6@2526.57,1328.74
NetC114_1: C114.1 U100.106 | length 168.5
  Top Layer w8: U100.106@3378.94,1387.8 3419.67,1387.8 3453.14,1354.33 3533.21,1354.33 C114.1@3533.46,1354.58
NetC115_1: C115.1 U100.71 | length 185.1
  Top Layer w8: U100.71@3277.56,656.5 3277.56,616.74 3314.58,579.72 3360.24,579.72 C115.1@3393.7,546.26
NetC300_1: C300.1 U300.1 Y300.4 | length 504.4
  Top Layer w8: Y300.4@1910.43,1799.21 1925.2,1813.98 2049.21,1813.98 C300.1@2075.79,1840.55 2105.5,1870.27 2105.5,1923.03 2029.53,1999.01 2029.53,2048.23 2001.97,2075.79 U300.1@1970.47,2075.79
NetC301_1: C301.1 U300.2 Y300.1 | length 368.3
  Top Layer w8: Y300.1@1910.43,1925.2 1921.26,1914.37 2050.2,1914.37 ; U300.2@1970.47,2050.2 2002.95,2050.2 2010.83,2042.32 2010.83,1995.08 2050.2,1955.71 2050.2,1914.37 ; C301.1@2075.79,1888.78 2050.2,1914.37
NetC304_2: C304.2 D300.2 R303.2 U302.6 | length 401
  Top Layer w8: D300.2@4009.84,1056.1 3998.03,1067.91 3998.03,1130.91 4016.73,1149.61 4016.73,1167.32 C304.2@4015.75,1168.31 4010.83,1173.23 R303.2@4010.83,1269.69 4010.83,1378.94 4032.48,1400.59 U302.6@4064.96,1400.59
NetC305_1: C305.1 D305.2 R308.1 U302.2 | length 500.8
  Top Layer w8: U302.2@3891.73,1426.18 3920.28,1426.18 3946.85,1399.61 R308.1@3946.85,1269.69 3946.85,1173.23 C305.1@3941.93,1168.31 3978.54,1131.7 3978.54,1026.39 D305.2@4009.84,995.08
NetC400_1: C400.1 U400.1
NetC400_2: C400.2 L400.1 U400.2
NetC403_1: C403.1 R401.1 R404.2 U400.6 | length 396.2
  Top Layer w8: U400.6@2559.06,2485.24 2559.06,2564.96 2682.09,2564.96 R401.1@2692.91,2575.79 2727.36,2610.24 2808.07,2610.24 R404.2@2842.52,2644.68
NetC403_2: C403.2 C404.2 L400.2 R400.2 R401.2 R402.2 R406.2 | length 611.5
  Top Layer w8: C404.2@2488.19,2643.7 C403.2@2555.12,2643.7 R402.2@2766.73,2643.7 ; R406.2@2972.44,2245.08 2989.17,2261.81 R400.2@2989.17,2384.84
  Top Layer w12: v1(2940.94,2370.08) 2974.41,2370.08 R400.2@2989.17,2384.84 ; v1(2940.94,2417.32) 2956.69,2417.32 R400.2@2989.17,2384.84 ; v1(2964.57,2444.88) 2964.57,2424.21 2989.17,2399.61 R400.2@2989.17,2384.84
  other v1: 2417.32,2637.8 2393.7,2669.29 2440.94,2669.29
NetC407_1: C407.1 U400.3 | length 112.4
  Top Layer w10: U400.3@2519.69,2310.04 2519.69,2251.97 C407.1@2558.07,2213.58
NetC408_1: C408.1 U400.7 | length 345.6
  Top Layer w8: U400.7@2539.37,2485.24 2539.37,2456.69 2551.18,2444.88 2820.87,2444.88 C408.1@2842.52,2423.23
NetD201_1: D201.1 J200.4 | length 173.1
  Top Layer w25: D201.1@657.48,2608.27 D201.1@694.88,2608.27 ; v1(724.41,2574.8) 712.6,2574.8 694.88,2592.52 D201.1@694.88,2608.27 ; v1(724.41,2641.73) 712.6,2641.73 694.88,2624.02 D201.1@694.88,2608.27 ; v1(725.39,2608.27) D201.1@694.88,2608.27
NetD203_1: D203.1 R202.2 | length 755.9
  Top Layer w8: D203.1@354.33,1653.54 354.33,1810.04 v1(363.19,1818.9) ; v1(905.51,1838.58) R202.2@905.51,1875
  Bottom Layer w8: v1(363.19,1818.9) 382.87,1838.58 v1(905.51,1838.58)
NetD204_1: D204.1 R204.2 | length 977.8
  Top Layer w8: D204.1@354.33,1486.22 388.8,1520.69 v1(388.8,1803.24) ; v1(984.25,1838.58) R204.2@984.25,1875
  Bottom Layer w8: v1(388.8,1803.24) 402.14,1816.58 962.25,1816.58 v1(984.25,1838.58)
NetD301_1: D301.1 R304.2 | length 102.9
  Top Layer w8: R304.2@3523.62,473.43 3537.4,473.43 D301.1@3600.39,536.42
NetD400_1: D400.1 R406.1 | length 261
  Top Layer w10: R406.1@3041.34,2245.08 3202.76,2245.08 3217.52,2259.84 D400.1@3296.26,2259.84
NetJ100_2: J100.2 R101.1 | length 104.5
  Top Layer w8: J100.2@621.65,137.8 622.05,138.19 R101.1@622.05,242.13
NetJ100_3: J100.3 R102.1 | length 105.4
  Top Layer w8: R102.1@721.46,243.11 721.46,137.99 J100.3@721.65,137.8
NetJ101_1: J101.1 R105.1 | length 134.8
  Bottom Layer w8: J101.1@777.56,370.08 R105.1@912.4,370.08
NetJ101_3: J101.3 R104.1 | length 134.8
  Bottom Layer w8: J101.3@777.56,270.08 R104.1@912.4,270.08
NetJ103_1: J103.1 R106.2 | length 293.4
  Top Layer w8: R106.2@2785.43,1904.53 v1(2827.76,1904.53) ; J103.1@2942.91,1879.92 v1(2942.91,1983.27)
  Bottom Layer w8: v1(2827.76,1904.53) 2906.5,1983.27 v1(2942.91,1983.27)
NetJ103_3: J103.3 SJ106.2 | length 178.6
  Top Layer w8: J103.3@3042.91,1879.92 v1(3042.91,1982.68)
  Bottom Layer w8: SJ106.2@2993.11,2017.72 3027.56,2017.72 3042.91,2002.36 v1(3042.91,1982.68)
NetJ103_7: J103.7 SJ107.2 | length 180
  Top Layer w8: J103.7@3242.91,1879.92 v1(3242.91,1983.07)
  Bottom Layer w8: SJ107.2@3191.93,2015.75 3231.3,2015.75 3242.91,2004.13 v1(3242.91,1983.07)
NetJ103_9: J103.9 SJ108.2 | length 179.8
  Top Layer w8: J103.9@3342.91,1879.92 v1(3342.91,1982.68)
  Bottom Layer w8: SJ108.2@3292.32,2015.75 3331.69,2015.75 3342.91,2004.53 v1(3342.91,1982.68)
NetJ103_11: J103.11 SJ109.2 | length 176.9
  Top Layer w8: J103.11@3442.91,1879.92 3443.9,1880.91 v1(3443.9,1984.25)
  Bottom Layer w8: SJ109.2@3393.7,2017.72 3400.4,2011.02 3430.91,2011.02 3443.9,1998.03 v1(3443.9,1984.25)
NetJ600_9: J600.9 RR601.5 | length 578.2
  Top Layer w8: RR601.5@4856.3,791.14 4905.71,791.14 5031.89,664.96 5304.33,664.96 5334.65,695.28 J600.9@5334.65,730.31
NetJ600_10: J600.10 RR601.6 | length 444.2
  Top Layer w8: RR601.6@4856.3,826.38 4913.78,826.38 5025.2,714.96 J600.10@5254.33,714.96
NetJ600_11: J600.11 RR601.7 | length 564.4
  Top Layer w8: RR601.7@4856.3,857.87 4917.72,857.87 5010.63,764.96 5304.33,764.96 5334.65,795.28 J600.11@5334.65,830.31
NetJ600_12: J600.12 RR601.8 | length 404.4
  Top Layer w8: RR601.8@4856.3,893.11 4921.85,893.11 4984.65,830.31 J600.12@5234.65,830.31
NetJ600_13: J600.13 RR600.5 | length 568.5
  Top Layer w8: RR600.5@4856.3,968.31 4893.9,968.31 4997.24,864.96 5303.94,864.96 5334.65,895.67 J600.13@5334.65,930.31
NetJ600_14: J600.14 RR600.6 | length 434.7
  Top Layer w8: RR600.6@4856.3,1003.54 4909.84,1003.54 4998.43,914.96 J600.14@5254.33,914.96
NetJ600_15: J600.15 RR600.7 | length 555
  Top Layer w8: RR600.7@4856.3,1035.04 4921.65,1035.04 4991.73,964.96 5304.33,964.96 5334.65,995.28 J600.15@5334.65,1030.31
NetJ600_16: J600.16 RR600.8 | length 420.9
  Top Layer w8: RR600.8@4856.3,1070.28 4931.69,1070.28 4987.01,1014.96 J600.16@5254.33,1014.96
NetJP200_2: JP200.2 U200.3 | length 1065.7
  Top Layer w8: U200.3@1069.88,2046.26 1069.88,1989.17 v1(1070.86,1988.18)
  Bottom Layer w8: JP200.2@137.8,1966.93 196.85,1966.93 250.65,1913.13 1031.24,1913.13 1070.86,1952.75 v1(1070.86,1988.18)
NetJP700_2: JP700.2 R704.2 | length 1661.4
  Top Layer w8: v1(4740.16,2094.49) 4709.35,2125.3 4709.35,2164.64 4708.66,2165.33 R704.2@4768.7,2225.37
  Bottom Layer w8: JP700.2@3592.52,1724.02 3667.72,1799.21 3702.76,1799.21 3758.86,1855.31 3758.86,1930.72 3747.69,1941.89 3747.69,2074.07 3760.57,2086.96 3892.37,2086.96 3949.8,2029.53 4675.2,2029.53 v1(4740.16,2094.49)
NetJP700_4: JP700.4 R705.2 | length 1451.2
  Top Layer w8: JP700.4@3692.52,1724.02 3692.52,1887.02 3746.45,1940.94 3916.34,1940.94 3931.93,1956.54 v1(3931.93,2114.33) ; v1@4731.3,2151.57 v1(4731.35,2151.52) R705.2@4768.7,2151.52
  Bottom Layer w8: v1(3931.93,2114.33) 3964.41,2114.33 3976.38,2102.36 4635.83,2102.36 4684.99,2151.52 v1(4731.35,2151.52)
NetQ700_1: Q700.1 R706.1 | length 499
  Top Layer w8: Q700.1@3580.71,2364.17 v1(3616.14,2364.17) ; R706.1@3875,2150.51 R706.1@3884.84,2160.36 3933.07,2208.58 v1(3933.07,2208.66)
  Bottom Layer w8: v1(3616.14,2364.17) 3637.8,2342.52 3799.21,2342.52 v1(3933.07,2208.66)
NetQ701_1: Q701.1 R711.1 | length 396.5
  Top Layer w8: Q701.1@3580.71,2222.44 3760.19,2042.96 3841.29,2042.96 R711.1@3884.84,2086.51
NetR201_2: R201.2 VR200.1 | length 423.4
  Top Layer w12: VR200.1@433.07,1946.75 710.73,1946.75 782.48,1875 R201.2@826.77,1875
NetR205_1: R205.1 U201.2 | length 411.6
  Bottom Layer w10: R205.1@1338.58,1875 1389.23,1875 1465.56,1951.33 1465.56,2028.55 1490.75,2053.74 U201.2@1490.75,2193.9
NetR405_1: R405.1 U400.4 | length 146.5
  Top Layer w10: U400.4@2539.37,2310.04 2540.35,2309.06 2540.35,2274.61 2555.12,2259.84 2583.66,2259.84 R405.1@2626.97,2216.54
NetR701_1: R701.1 U700.3 | length 135.1
  Top Layer w8: R701.1@3884.84,2234.2 4016.23,2234.2 U700.3@4018.87,2231.56
NetR704_1: R704.1 R707.1 TP701.1 U700.22 | length 1415.2
  Top Layer w8: U700.22@4632.87,2388.56 4709.87,2388.56 v1(4724.41,2374.02) R707.1@4768.7,2374.02 ; TP701.1@4783.46,1641.73 4783.46,1610.24 4838.58,1555.12 4953.98,1555.12 4976.38,1577.52 4976.38,1734.25 4917.32,1793.31 4917.32,2027.56 4871.25,2073.63 4871.25,2184.05 4837.6,2217.71 R704.1@4837.6,2225.37 v1(4874.97,2225.37)
  Bottom Layer w8: v1(4724.41,2374.02) 4799.21,2374.02 4898.28,2274.95 4898.28,2248.67 v1(4874.97,2225.37)
NetR705_1: R705.1 R709.1 TP700.1 U700.21 | length 861.2
  Top Layer w8: U700.21@4632.87,2310.56 4709.13,2310.56 4720.47,2299.21 R709.1@4768.7,2299.21 4802.35,2265.56 4802.35,2186.77 R705.1@4837.6,2151.52 4837.6,2070.02 4898.99,2008.62 4898.99,1664 TP700.1@4921.26,1641.73